# Altium PCB daq.PcbDoc (part 2 of 2)
Units mil, origin at the board's own origin, x right, y up, seen from the top; angles counter-clockwise.
Board outline 3518.7 x 2235.24 mil, 2 copper layers (Top Layer, Bottom Layer); 88 components, 70 nets, 370 pads, 56 vias.
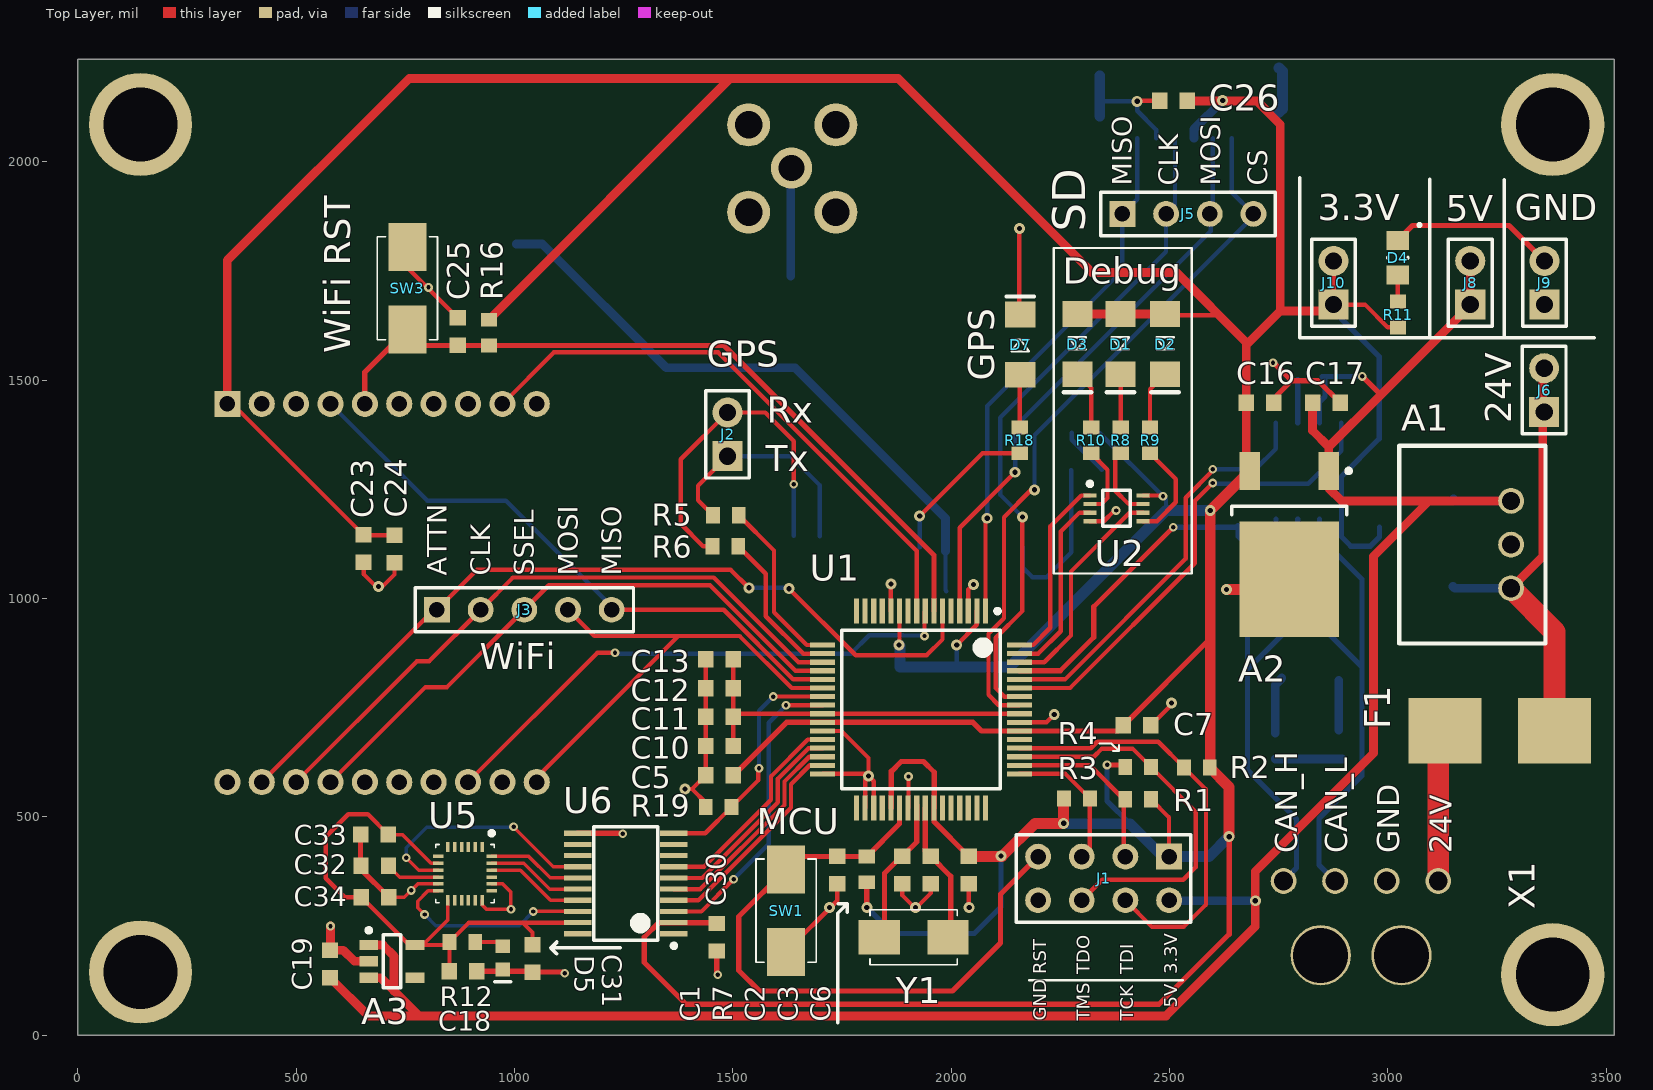
[diagram p0: Top Layer view]

## Polygon pours and split planes (outlines as drawn)
GND on Bottom Layer "Bottom Layer-GND" (solid, pour order 0): 19.68,2204.72 3487.2,2204.72 3487.2,30.51 3469.49,48.23 19.69,48.23

## Other copper
Top Layer:
  text ".Layer_Name" at -1433.73,982.02 h40
Bottom Layer:
  text ".Layer_Name" at -1421.63,846.45 h40

## Silkscreen, mask and mechanical layers (free items; w line width, h text height)
Top Overlay:
  lines w5: 2179.13,125.98 2531.5,125.98 ; 2339.57,668.31 2367.13,668.31 2384.84,650.59 ; 2371.06,650.59 2384.84,650.59 ; 2384.84,664.37 2384.84,650.59 ; 2551.18,1057.09 2235.24,1057.09 2235.24,1803.15 2551.18,1803.15 2551.18,1057.09 ; 2551.18,1057.09 2551.18,1057.09
  lines w8: 1085.63,199.8 1083.66,199.8 ; 1096.46,187.01 1083.66,199.8 ; 1097.44,213.58 1083.66,199.8 ; 1242.13,199.8 1083.66,199.8 ; 1740.16,28.54 1740.16,279.53 1761.81,301.18 ; 1741.14,301.18 1761.81,301.18 ; 1761.81,281.5 1761.81,301.18 ; 2798.23,1963.58 2798.23,1597.44 3473.43,1597.44 ; 3096.46,1601.38 3096.46,1960.63 ; 3266.73,1600.39 3266.73,1958.66 ; 1083.66,199.8 1083.66,199.8 ; 1083.66,199.8 1083.66,199.8
  text "MISO" at 2413.39,1945.87 h45 r90
  text "CLK" at 2520.67,1945.87 h45 r90
  text "MOSI" at 2616.14,1945.87 h45 r90
  text "CS" at 2724.41,1945.87 h45 r90
  text "3.3V" at 2839.57,1866.14 h60
  text "GND" at 3291.34,1866.14 h60
  text "5V" at 3132.87,1864.17 h60
  text "SD" at 2307.09,1839.57 h75 r90
  text "Debug" at 2255.91,1721.46 h60
  text "WiFi RST" at 624.02,1562.01 h60 r90
  text "GPS" at 1440.94,1530.51 h60
  text "GPS" at 2098.43,1499.02 h60 r90
  text "Rx" at 1577.76,1402.56 h60
  text "24V" at 3282.48,1401.57 h60 r90
  text "Tx" at 1575.79,1291.34 h60
  text ".Layer_Name" at -1431.31,1136.96 h40
  text "ATTN" at 844.49,1052.17 h45 r90
  text "CLK" at 944.64,1052.17 h45 r90
  text "SSEL" at 1044.78,1052.17 h45 r90
  text "MOSI" at 1144.93,1052.17 h45 r90
  text "MISO" at 1245.08,1052.17 h45 r90
  text "WiFi" at 920.28,837.6 h60
  text "MCU" at 1555.12,460.63 h60
  text "CAN_H" at 2792.32,417.32 h50 r90
  text "CAN_L" at 2907.48,417.32 h50 r90
  text "GND" at 3026.57,417.32 h50 r90
  text "24V" at 3146.65,417.32 h50 r90
Bottom Overlay:
  lines w8: 2969.49,655.51 2950.79,674.21 ; 2971.46,694.88 2950.79,674.21 ; 3037.4,603.35 3037.4,751.97 ; 3037.4,674.21 2950.79,674.21
  text ".Layer_Name" at -1426.47,689.09 h40
Top Paste:
  text ".Layer_Name" at -1428.38,1210.8 h40
Bottom Paste:
  text ".Layer_Name" at -1426.47,606.77 h40
Top Solder:
  text ".Layer_Name" at -1431.31,1059.49 h40
Bottom Solder:
  text ".Layer_Name" at -1424.05,771.4 h40
Dimensions:
  text ".Layer_Name" at -1428.15,530.51 h40

## Dimensions
3518.7,2235.24 to 0,0 on Dimensions

## Text inside footprints (layer, text, board x,y; h text height)
J1: Top Overlay "GND" at 2217.52,33.46 h30 r90; Top Overlay "3.3V" at 2517.72,139.76 h30 r90; Top Overlay "TCK" at 2417.65,33.46 h30 r90; Top Overlay "TDI" at 2417.65,139.76 h30 r90; Top Overlay "TDO" at 2317.59,139.76 h30 r90; Top Overlay "TMS" at 2317.59,33.46 h30 r90; Top Overlay "RST" at 2217.52,139.76 h30 r90; Top Overlay "5V" at 2517.72,63.45 h30 r90